# Altium PCB board.PcbDoc
Units mm, origin at the board's own origin, x right, y up, seen from the top; angles counter-clockwise.
Board outline 43 x 55 mm, 2 copper layers (Top Layer, Bottom Layer); 62 components, 39 nets, 217 pads, 106 vias.
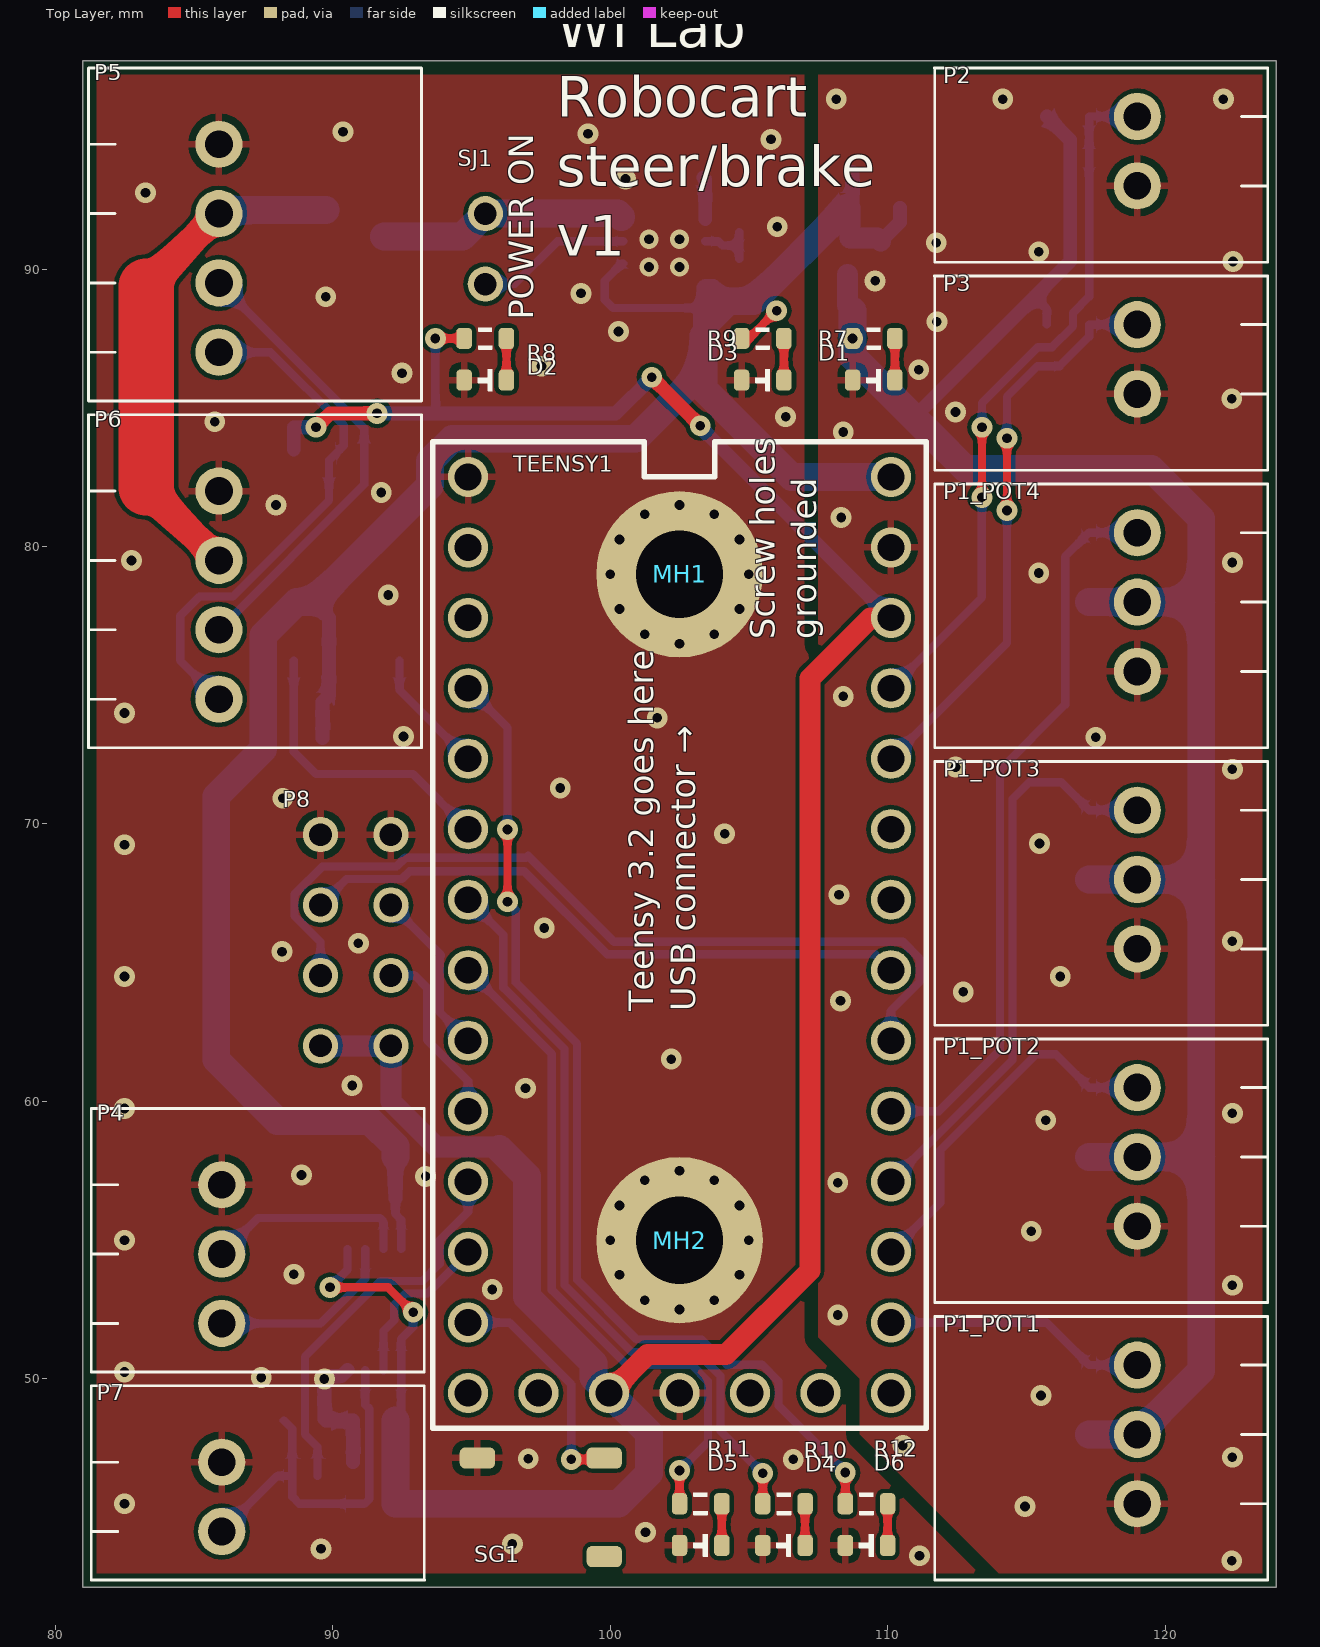
[diagram p0: Top Layer view]
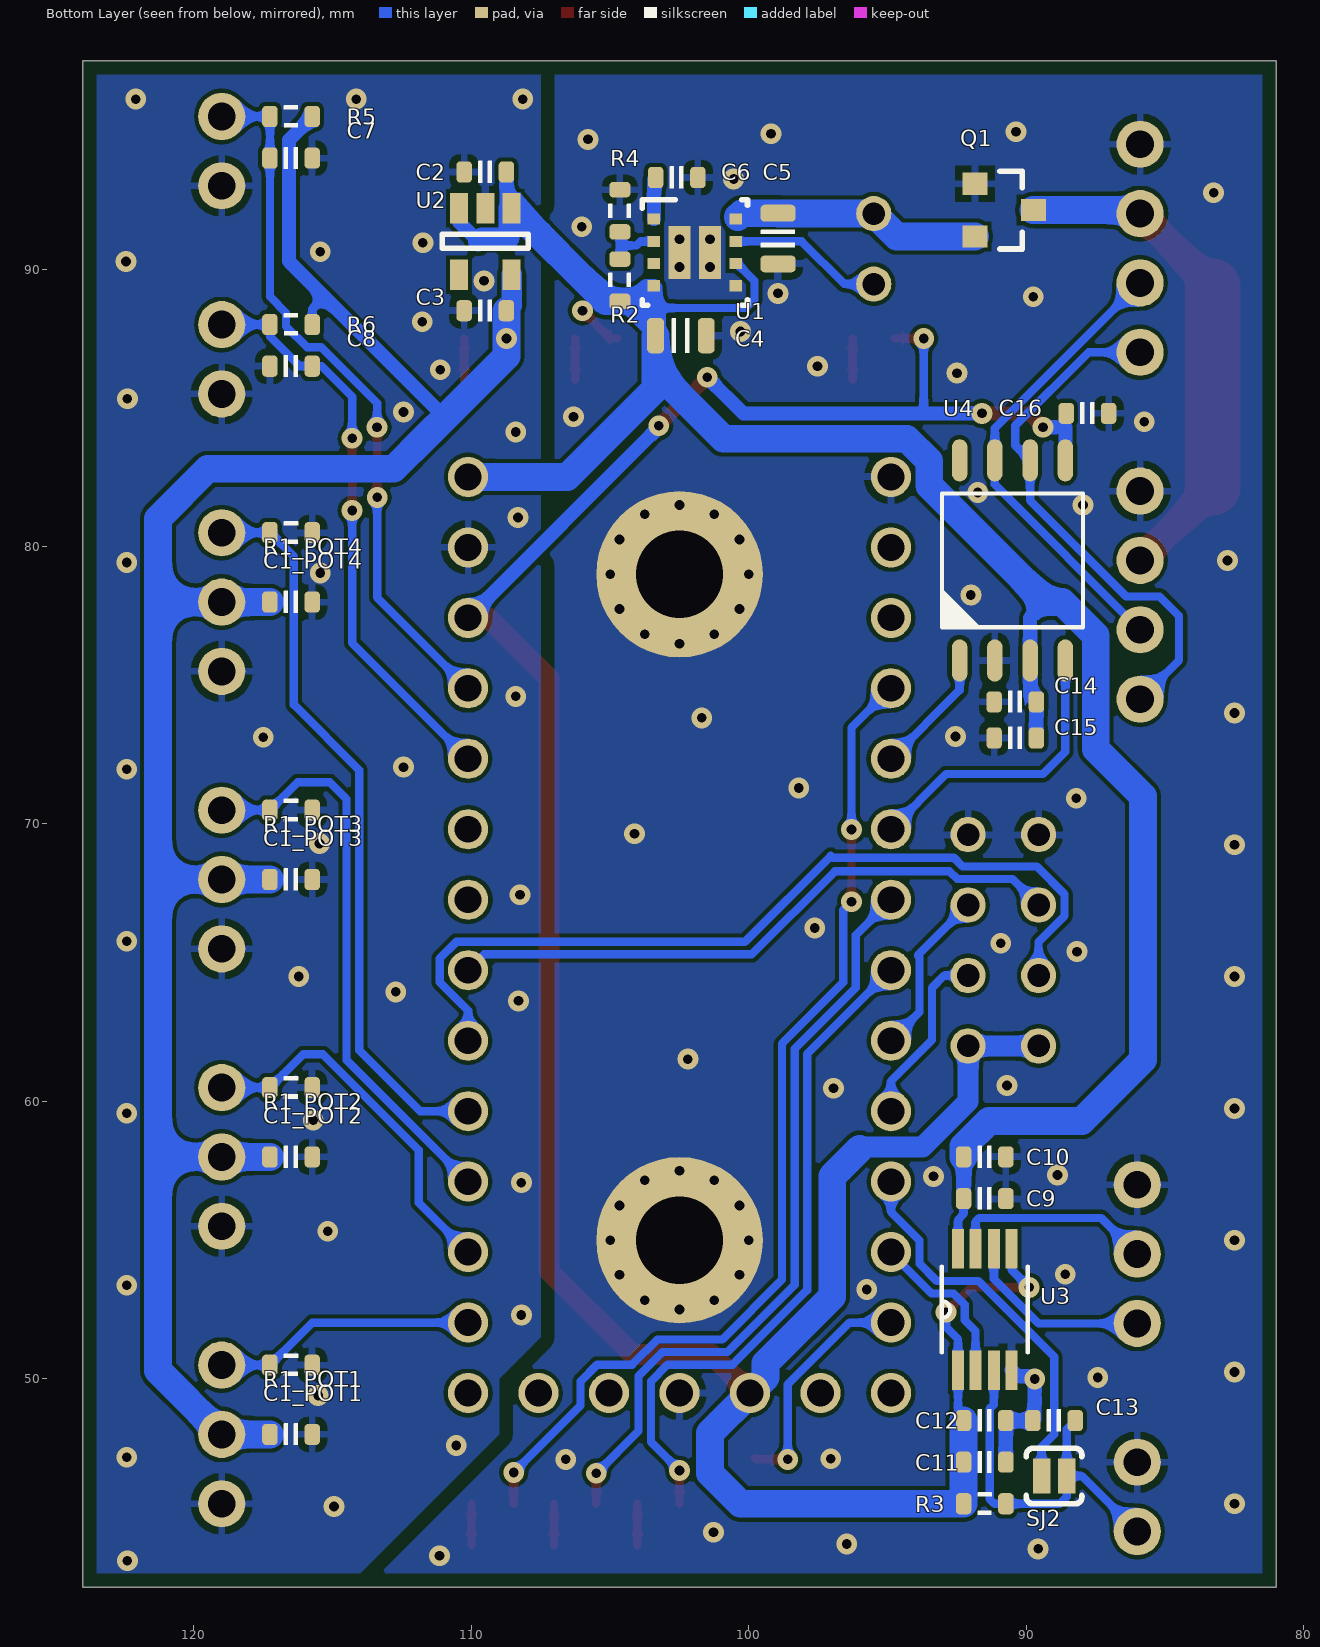
[diagram p1: Bottom Layer view, seen from below]
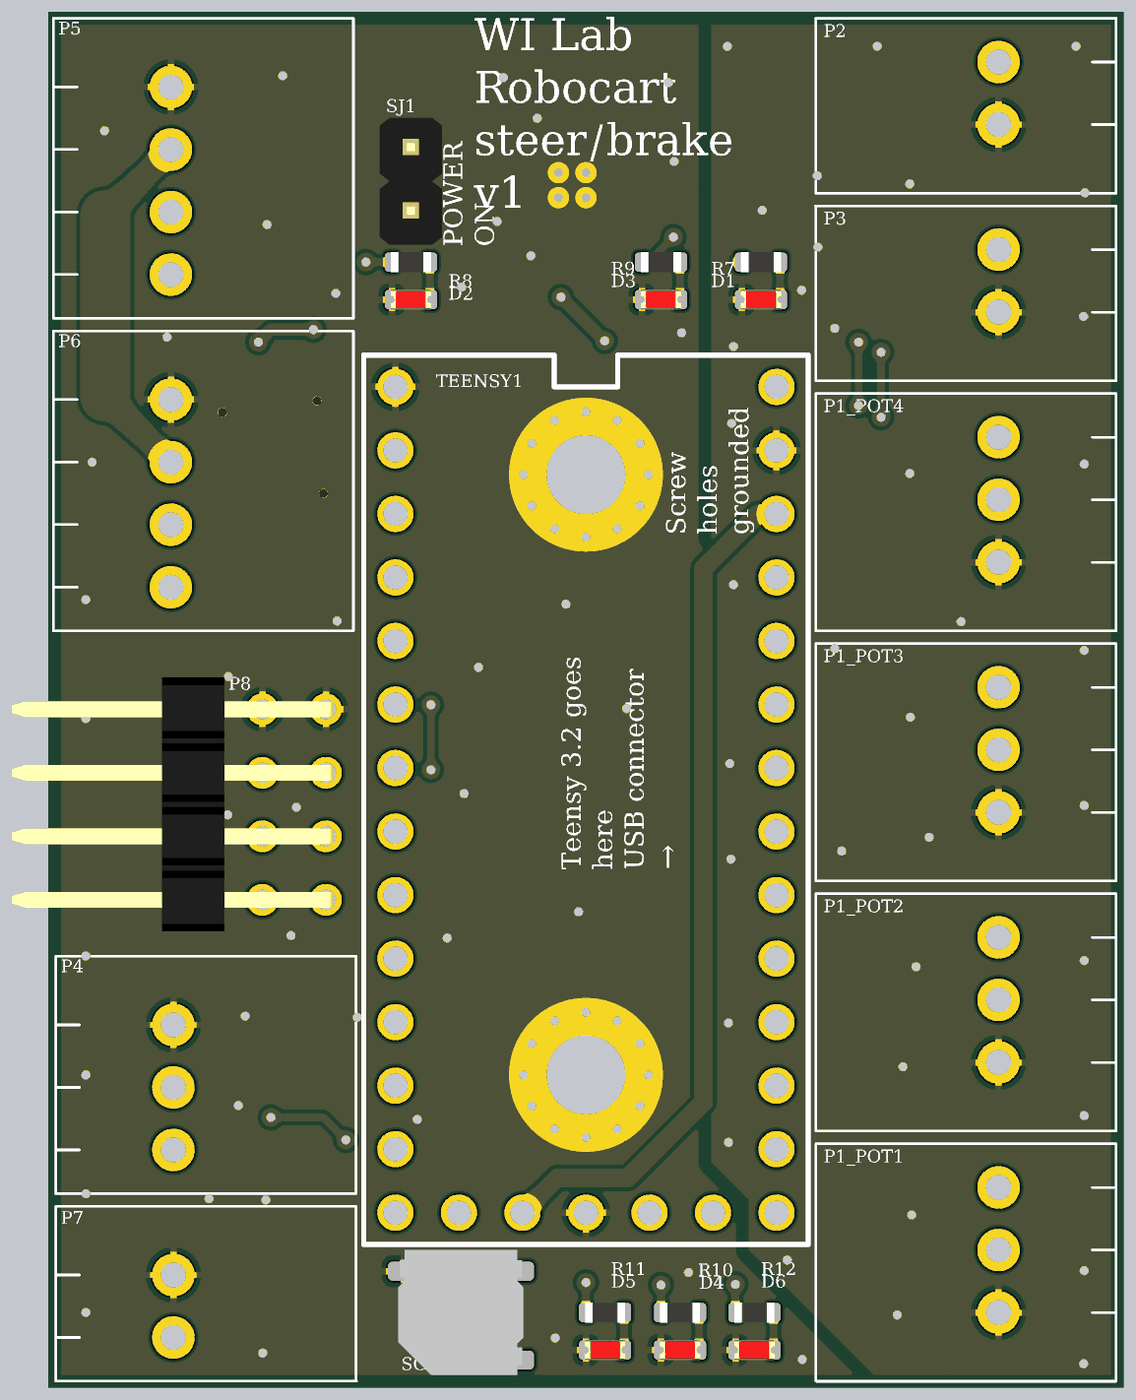
[diagram p2: 3D render of the assembled board from above, using the file's embedded part models]
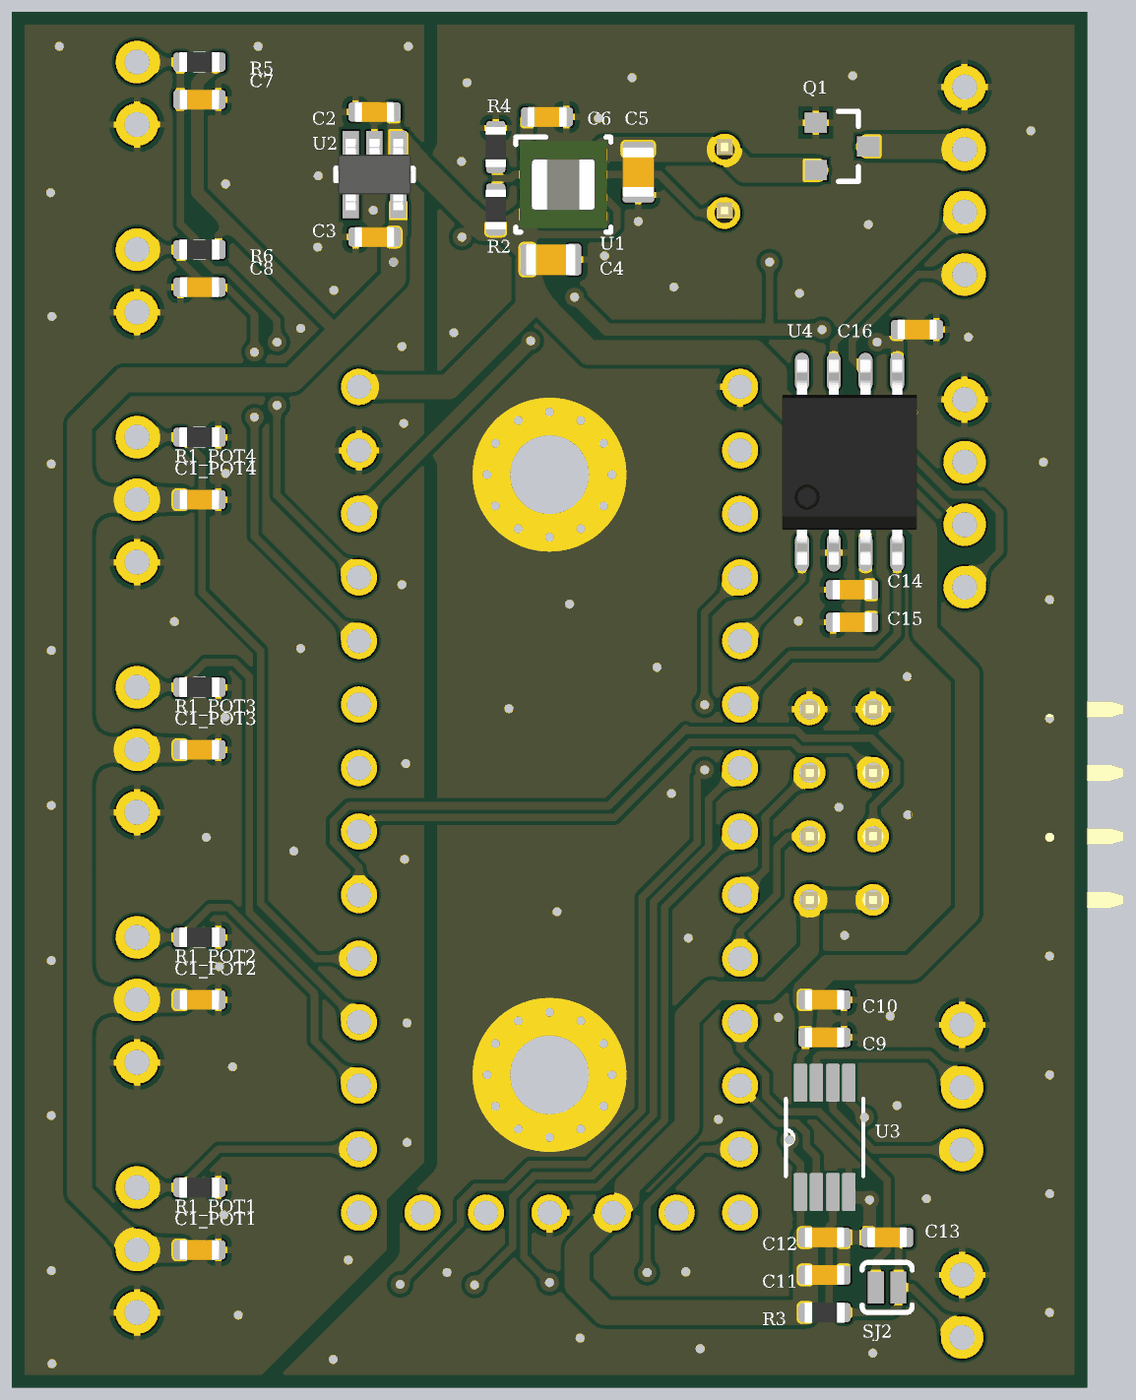
[diagram p3: 3D render of the assembled board from below, using the file's embedded part models]

## Layer stack, top to bottom
Top Solder: solder mask 0.0102, Solder Resist, Dk 3.5
Top Layer: signal copper 0.0356
Dielectric 1: dielectric 0.32, FR-4, Dk 4.8
Bottom Layer: signal copper 0.0356
Bottom Solder: solder mask 0.0102, Solder Resist, Dk 3.5

## Board outline
81,42.5 124,42.5 124,97.5 81,97.5

## Design rules (kind name [scope] priority, off if disabled: settings)
BoardOutlineClearance [InNetClass('All Nets')] p1: gap=0.381
Clearance "Stitching GND" [IsStitchingVia and InNet('GND') vs (IsVia and (Not IsStitchingVia)) Or IsPad] p1: gap=0.127
Clearance Clearance_outlinepolygon [inPolygon vs OnLayer('Keep-Out Layer')] p2: gap=0.4
Clearance Clearance-polygonpolygon [InPolygon vs InPolygon] p3: gap=0.5
Clearance Clearance_2 [All] p4: gap=0.152
ComponentClearance [InComponent('TEENSY1')] p1: gap=-999 collisioncheckmode=3 verticalgap=0.254 showdistances=FALSE
ComponentClearance ComponentClearance_4 [All] p2: gap=0.254 collisioncheckmode=3 verticalgap=0.254 showdistances=FALSE
HoleSize [All] p1: absolutevalues=TRUE maxlimit=6 minlimit=0.33 maxpercent=80.000 minpercent=20.000
MinimumAnnularRing ignore [(HasFootprint('LMZ21701SIL') OR HasFootprint('m3 hole') OR HasFootprint('G3T-12AH'))] p1: minimumring=0
MinimumAnnularRing [All] p2: minimumring=0.178
MinimumSolderMaskSliver [All] p1: minsoldermaskwidth=0.076
NetAntennae [All] p1: netantennaetolerance=2
PolygonConnect PolygonConnect_heat [(HasFootprint('LMZ21701SIL') OR HasFootprint('m3 hole') OR HasFootprint('G3T-12AH') OR IsVia)] p1: connectstyle=Direct reliefconductorwidth=0.254 reliefentries=4 polygonreliefangle="90 Angle" airgapwidth=0.254
PolygonConnect [All] p2: connectstyle=Relief reliefconductorwidth=0.254 reliefentries=4 polygonreliefangle="90 Angle" airgapwidth=0.254
RoomDefinition POT4 [InComponentClass('POT4')] p1: confinementstyle=ConfineIn formatcopy=TRUE lockcomponents=FALSE outline 124,72.5 124,82.5 111.5,82.5 111.5,72.5
RoomDefinition POT3 [InComponentClass('POT3')] p2: confinementstyle=ConfineIn formatcopy=TRUE lockcomponents=FALSE outline 124,62.5 124,72.5 111.5,72.5 111.5,62.5
RoomDefinition POT2 [InComponentClass('POT2')] p3: confinementstyle=ConfineIn formatcopy=TRUE lockcomponents=FALSE outline 124,52.5 124,62.5 111.5,62.5 111.5,52.5
RoomDefinition POT1 [InComponentClass('POT1')] p4: confinementstyle=ConfineIn formatcopy=TRUE lockcomponents=FALSE outline 124,42.5 124,52.5 111.5,52.5 111.5,42.5
RoutingVias [All] p1: holewidth=0.711 width=1.27 viastyle="Through Hole" minholewidth=0.711 minwidth=1.27 maxholewidth=0.711 maxwidth=1.27 useviatemplates=TRUE viatemplateguid#1={850C7D40-0D71-414F-9035-CEB09108B0E3} viatemplateguid#2={E962499E-84C4-4C12-BD13-6AB3B20336B4} viatemplatename#1=signal viatemplatename#2=v70h35mx0
SilkToSilkClearance [All] p1 off: silktosilkclearance=0
SilkToSolderMaskClearance SilkToSolderMaskClearance_1 [HasFootprint('PAD-JUMPER-2-NO_YES_SILK')] p1: minsilkscreentomaskgap=0 clearancetoexposedcopper=TRUE
SilkToSolderMaskClearance [IsPad] p2: minsilkscreentomaskgap=0.15 clearancetoexposedcopper=TRUE
SolderMaskExpansion [All] p1: expansion=0.076
Width [All] p1: maxlimit=25.375 minlimit=0.152 preferedwidth=0.3
24 further rules are at their usual default settings.

## Classes and differential pairs
component class POT1: C1_POT1 P1_POT1 R1_POT1
component class POT2: C1_POT2 P1_POT2 R1_POT2
component class POT3: C1_POT3 P1_POT3 R1_POT3
component class POT4: C1_POT4 P1_POT4 R1_POT4
component class Sheet1: C2 C3 C4 C5 C6 C7 C8 C9 C10 C11 C12 C13 C14 C15 C16 D1 D2 D3 D4 D5 D6 MH1 MH2 P2 P3 P4 P5 P6 P7 P8 Q1 R2 R3 R4 R5 R6 R7 R8 R9 R10 R11 R12 SG1 SJ1 SJ2 TEENSY1 U1 U2 U3 U4
channel class pot: POT1 POT2 POT3 POT4

## Components (designator, comment, footprint, x,y, rotation, side; value= is the part's Value field where it differs from the comment)
C1_POT1 "Cap_0603" CAP_0603 116.5,48 r0 bottom (schematic designator C1)
C1_POT2 "Cap_0603" CAP_0603 116.5,58 r0 bottom (schematic designator C1)
C1_POT3 "Cap_0603" CAP_0603 116.5,68 r0 bottom (schematic designator C1)
C1_POT4 "Cap_0603" CAP_0603 116.5,78 r0 bottom (schematic designator C1)
C2 "GRM188R71A225KE15D" CAP_0603 109.5,93.5 r180 bottom
C3 "GRM188R71A225KE15D" CAP_0603 109.5,88.5 r180 bottom
C4 "GRM188R71A225KE15D" CAP_0805 102.45,87.6 r180 bottom
C5 "GRM155R71E822KA01D" CAP_0805 98.95,91.1 r270 bottom
C6 "GRM155R71E822KA01D" CAP_0603 102.6,93.3 r180 bottom
C7 "Cap_0603" CAP_0603 116.5,94 r0 bottom
C8 "Cap_0603" CAP_0603 116.5,86.5 r180 bottom
C9 "Cap_0603" CAP_0603 91.5,56.5 r0 bottom
C10 "Cap_0603" CAP_0603 91.5,58 r0 bottom
C11 "Cap_0603" CAP_0603 91.5,47 r0 bottom
C12 "Cap_0603" CAP_0603 91.5,48.5 r0 bottom
C13 "Cap_0603" CAP_0603 89,48.5 r180 bottom
C14 "Cap_0603" CAP_0603 90.4,74.4 r180 bottom
C15 "Cap_0603" CAP_0603 90.4,73.1 r180 bottom
C16 "Cap_0603" CAP_0603 87.8,84.8 r0 bottom
D1 "LED_0603" LED_0603_RED 109.5,86 r180 top
D2 "LED_0603" LED_0603_RED 95.5,86 r180 top
D3 "LED_0603" LED_0603_RED 105.5,86 r180 top
D4 "LED_0603" LED_0603_RED 106.262,44 r180 top
D5 "LED_0603" LED_0603_RED 103.262,44 r180 top
D6 "LED_0603" LED_0603_RED 109.238,44 r180 top
MH1 "mounting hole" "M3 hole" 102.5,79 r0 top
MH2 "mounting hole" "M3 hole" 102.5,55 r0 top
P1_POT1 "pot" "COMBICON PTSA 3" 119,45.5 r90 top (schematic designator P1)
P1_POT2 "pot" "COMBICON PTSA 3" 119,55.5 r90 top (schematic designator P1)
P1_POT3 "pot" "COMBICON PTSA 3" 119,65.5 r90 top (schematic designator P1)
P1_POT4 "pot" "COMBICON PTSA 3" 119,75.5 r90 top (schematic designator P1)
P2 "brake_limit_sw_left" "COMBICON PTSA 2" 119,92.999 r90 top
P3 "brake_limit_sw_right" "COMBICON PTSA 2" 119,85.499 r90 top
P4 "Sabertooth" "COMBICON PTSA 3" 86,57 r270 top
P5 "CAN bus" "COMBICON PTSA 4" 85.9,94.5 r270 top
P6 "CAN bus" "COMBICON PTSA 4" 85.9,82 r270 top
P7 "st estop" "COMBICON PTSA 2" 86,47 r270 top
P8 "HDR2x4_2.54" HDR2X4_2.54_90 92.1,62 r180 top
Q1 "Generic PMOSFET    IRLML2244 - TRANS-11153 (SOT-23 -20V -4.3A) (1.Gate 2.Source 3.Drain)     FQP27P06 - COM-10349(TO-220 -60V -27A) (1.Gate 2.Source 3.Drain)" SOT23-3 90.85,92.125 r270 bottom
R1_POT1 "Res_0603" RES_0603 116.5,50.5 r0 bottom (schematic designator R1)
R1_POT2 "Res_0603" RES_0603 116.5,60.5 r0 bottom (schematic designator R1)
R1_POT3 "Res_0603" RES_0603 116.5,70.5 r0 bottom (schematic designator R1)
R1_POT4 "Res_0603" RES_0603 116.5,80.5 r0 bottom (schematic designator R1)
R2 "CRCW040235K7FKED" RES_0603 104.65,89.6 r270 bottom
R3 "Res_0603" RES_0603 91.5,45.5 r0 bottom
R4 "CRCW04026K81FKED" RES_0603 104.65,92.1 r270 bottom
R5 "Res_0603" RES_0603 116.5,95.5 r180 bottom
R6 "Res_0603" RES_0603 116.5,88 r180 bottom
R7 "Res_0603" RES_0603 109.5,87.5 r0 top
R8 "Res_0603" RES_0603 95.5,87.5 r0 top
R9 "Res_0603" RES_0603 105.499,87.5 r0 top
R10 "Res_0603" RES_0603 106.262,45.5 r0 top
R11 "Res_0603" RES_0603 103.262,45.5 r0 top
R12 "Res_0603" RES_0603 109.238,45.5 r0 top
SG1 "Buzzer 12mmSpark Fun Electronics SKU : Comp-Buzzer" Buzzer_5x5 97.5,45.5 r90 top
SJ1 "turn on" HDR1X2_2.54_180 95.5,92 r0 top
SJ2 "st s2" PAD-JUMPER-2-NO_YES_SILK 89,46.5 r180 bottom
TEENSY1 "Footprint for Teensy 3.1 board using all pin connections on the outer perimeter" TEENSY_3.1_BASIC_FIXED 102.5,66 r0 top
U1 "LMZ21701SIL" LMZ21701SIL 101.95,90.6 r0 bottom
U2 "LP5907MFX-3.3/NOPB" DBV0005A_N 109.5,91.001 r270 bottom
U3 "74LVCH2T45 Dual supply translating transceiver; 3-state" SOP65P490X110-8N 91.5,52.5 r90 bottom
U4 "TCAN1051HGV CAN transceiver" SOIC_E200_8 90.5,79.5 r90 bottom

## Footprints (in the part's own frame and the unit in brackets; to place one, negate y for a bottom-side part, rotate by r counter-clockwise, add the part's x,y. Pads: shape width x height; smd on the part's side, far side on the other; paste and mask are expansions set on the pad)
Buzzer_5x5 [mil]
  rrect50% 30x50 smd: N(65,90) NC(-75,-90) P(65,-90)
  body extent -98,-98 98,98, height 106
CAP_0603 [mil]
  rrect50% 22x30 smd: 1(-30,0) 2(30,0)
  silkscreen extent -10,-15 10,15, body extent -31,-16 31,16, height 31
CAP_0805 [mil]
  rrect50% 24x50 smd: 1(-36,0) 2(36,0)
  silkscreen extent -12,-24 12,24, body extent -39,-25 39,25, height 39
"COMBICON PTSA 2" [mm]
  round 1.7 hole 1: 1(0,0) 2(2.5,0)
  silkscreen extent -2.75,-4.7 4.25,7.32
"COMBICON PTSA 3" [mm]
  round 1.7 hole 1: 1(0,0) 2(2.5,0) 3(5,0)
  silkscreen extent -2.75,-4.7 6.75,7.3
"COMBICON PTSA 4" [mm]
  round 1.7 hole 1: 1(0,0) 2(2.5,0) 3(5,0) 4(7.5,0)
  silkscreen extent -2.75,-4.7 9.25,7.3
DBV0005A_N [mm]
  rect 1.1x0.65 smd: 1(-1.2,0.95) 2(-1.2,0) 3(-1.2,-0.95) 4(1.2,-0.95) 5(1.2,0.95)
  silkscreen extent -0.25,-1.55 0.25,1.55, body extent -1.42,-1.46 1.42,1.46, height 1.08
HDR1X2_2.54_180 [mil]
  round 50 hole 32: 1(0,0) 2(0,-100)
  body extent -49,-150 49,50, height 323
HDR2X4_2.54_90 [mil]
  round 50 hole 32: 1(0,0) 2(100,0) 3(0,-100) 4(100,-100) 5(0,-200) 6(100,-200) 7(0,-300) 8(100,-300)
  body extent -12,-350 495,50, height 198
LED_0603_RED [mil]
  rrect50% 22x30 smd: 1(-30,0) 2(30,0)
  silkscreen extent -10,-16 10,16, body extent -32,-16 32,16, height 24
LMZ21701SIL [mm]
  rect 0.45x0.4 smd mask+0.07: 1(1.475,-1.2) 2(1.475,-0.4) 3(1.475,0.4) 4(1.475,1.2) 5(-1.475,1.2) 6(-1.475,0.4) 7(-1.475,-0.4) 8(-1.475,-1.2)
  rect 0.8x1.9 smd paste-0.5 mask+0.07: 9(0.55,0) 10(-0.55,0)
  silkscreen extent -1.9,-1.9 1.9,1.9, body extent -1.75,-1.75 1.75,1.75, height 1.66
"M3 hole" [mm]
  round 0.7 hole 0.35: 1(-2.5,0) 1(-2.165,-1.25) 1(-2.165,1.25) 1(-1.25,-2.165) 1(-1.25,2.165) 1(0,-2.5) 1(0,2.5) 1(1.25,-2.165) 1(1.25,2.165) 1(2.165,-1.25) 1(2.165,1.25) 1(2.5,0)
  round 6 hole 3.15: 1(0,0)
PAD-JUMPER-2-NO_YES_SILK [mm]
  rect 0.635x1.27 smd: 1(-0.45,0) 2(0.45,0)
  silkscreen extent -1,-1 1,1
RES_0603 [mil]
  rrect50% 22x30 smd: 1(-30,0) 2(30,0)
  silkscreen extent -10,-16 10,16, body extent -31,-16 31,16, height 18
SOIC_E200_8 [mil]
  oval 60x22 smd: 1(-142,75) 2(-142,25) 3(-142,-25) 4(-142,-75) 5(142,-75) 6(142,-25) 7(142,25) 8(142,75)
  silkscreen extent -95,-100 95,100, body extent -161,-106 161,106, height 84
SOP65P490X110-8N [mil]
  rect 56x17 smd paste+1.97 mask+1.97: 1(-86,38) 2(-86,13) 3(-86,-13) 4(-86,-38) 5(86,-38) 6(86,-13) 7(86,13) 8(86,38)
  silkscreen extent -61,-61 61,61
SOT23-3 [mil]
  rect 31.5x35.43 smd: 1(-37.4,-39.37) 2(37.4,-39.37) 3(0,43.31)
  silkscreen extent -55,-4 55,28
TEENSY_3.1_BASIC_FIXED [mil]
  round 57 hole 38: 0(-300,550) 1(-300,450) 2(-300,350) 3(-300,250) 3.3V(-100,-650) 3.3V(300,450) 4(-300,150) 5(-300,50) 6(-300,-50) 7(-300,-150) 8(-300,-250) 9(-300,-350) 10(-300,-450) 11(-300,-550) 12(-300,-650) 13(300,-650) 14/A0(300,-550) 15/A1(300,-450) 16/A2(300,-350) 17/A3(300,-250) 18/A4(300,-150) 19/A5(300,-50) 20/A6(300,50) 21/A7(300,150) 22/A8(300,250) 23/A9(300,350) A14(200,-650) AGND(300,550) GND(-300,650) GND(0,-650) PGM(100,-650) VBAT(-200,-650) VIN(300,650)
  silkscreen extent -350,-700 350,700

## Part data
C1_POT1 C1_POT2 C1_POT3 C1_POT4 C7 C8 C9 C10 C11 C12 C13 C14 C15 C16: "Capacitor"
C2 C4: "CAP, CERM, 2.2uF, 10V, +/-10%, X7R, 0603"
C3: "CAP, CERM, 2.2 µF, 10 V, +/- 10%, X7R, 0603"
C5 C6: "CAP, CERM, 8200pF, 25V, +/-10%, X7R, 0402"
D1 D2 D3 D4 D5 D6: "LED"
MH1 MH2: library part TEST-POINT2
P1_POT1 P1_POT2 P1_POT3 P1_POT4 P4: library part HDR1x3_2.54, "Header"
P2 P3 P7: library part HDR1x2_2.54, "Header"
P5 P6: library part HDR1x4_2.54, "Header"
P8: "Header"
Q1: library part MOSFET-PCHANNEL
R1_POT1 R1_POT2 R1_POT3 R1_POT4 R3 R5 R6 R7 R8 R9 R10 R11 R12: "Resistor"
R2: "RES, 35.7k ohm, 1%, 0.063W, 0402"
R4: "RES, 6.81k ohm, 1%, 0.063W, 0402"
SG1: library part BUZZERPTH
SJ1 SJ2: library part JUMPER-PAD-2-NOROUND
TEENSY1: library part TEENSY_3.1_BASIC
U1: "1A SIMPLE SWITCHER Nano Module with 17V Maximum Input Voltage, SIL0008E"
U2: "ULTRA LOW-NOISE, 250-mA LINEAR REGULATOR FOR RF AND ANALOG CIRCUITS REQUIRES NO BYPASS CAPACITOR, DBV0005A"
U3: library part 74LVCH2T45
U4: library part TCAN1051HGV

## Via types
v1: diameter 0.75, hole 0.35, Top Layer to Bottom Layer, tented both sides, 102 vias
v2: diameter 0.7, hole 0.35, Top Layer to Bottom Layer, tented bottom, 4 vias

## Nets (pads, with @x,y where several pads share a name; then routed paths per layer and width w, separated by ;. In a path a pad name is that pad's centre, name@x,y a point inside that pad or via, vN(x,y) a via of type N, cw(c..) or ccw(c..) an arc to the next point about the centre after c; other vN are vias at no path point)
AGND: C1_POT1.1 C1_POT2.1 C1_POT3.1 C1_POT4.1 C2.1 C3.1 C7.1 C8.1 D1.2 P1_POT1.1 P1_POT2.1 P1_POT3.1 P1_POT4.1 P2.1 P3.1 R1_POT1.1 R1_POT2.1 R1_POT3.1 R1_POT4.1 TEENSY1.AGND U2.2
  other v1: 122.4,43.45 114.95,45.4 122.425,47.175 110.55,47.6 115.525,49.4 108.2,52.3 122.425,53.375 115.175,55.325 108.2,57.075 115.7,59.325 122.425,59.575 108.3,63.625 112.725,63.95 116.225,64.5 122.425,65.775 108.25,67.45 115.475,69.3 122.425,71.975 112.45,72.05 117.5,73.125 108.4,74.6 115.45,79.05 122.425,79.425 108.325,81.05 108.4,84.125 112.45,84.85 122.4,85.325 111.125,86.375 111.775,88.1 109.55,89.575 122.45,90.275 115.45,90.625 111.75,90.95 108.15,96.125 114.15,96.125 122.1,96.125
BEEPER: SG1.P TEENSY1.11 | length 8.6
  Top Layer w0.3: v1(98.6,47.1) 99.735,47.1 SG1.P
  Bottom Layer w0.3: TEENSY1.11 96.37,52.03 98.6,49.8 v1(98.6,47.1)
BRAKE_PEDAL_POT_WIPER: P1_POT4.3 R1_POT4.2 TEENSY1.17/A3 | length 26.6
  Bottom Layer w0.3: TEENSY1.17/A3 111.85,59.65 114.048,61.848 114.048,71.948 116.4,74.3 116.4,79.637 R1_POT4.2 P1_POT4.3
BRAKE_POT_WIPER: P1_POT2.3 R1_POT2.2 TEENSY1.15/A1 | length 13.4
  Bottom Layer w0.3: TEENSY1.15/A1 111.9,56.35 111.9,58.25 115.35,61.7 116.062,61.7 R1_POT2.2 ; R1_POT2.2 P1_POT2.3
CAN_RXD: TEENSY1.4 U4.4 | length 10.7
  Bottom Layer w0.3: U4.4 88.595,72.605 89.4,71.8 92.89,71.8 TEENSY1.4
CAN_TXD: TEENSY1.3 U4.1 | length 4.6
  Bottom Layer w0.3: U4.1 92.405,74.825 TEENSY1.3
GAS_PEDAL_POT_WIPER: P1_POT3.3 R1_POT3.2 TEENSY1.16/A2 | length 20.8
  Bottom Layer w0.3: TEENSY1.16/A2 114.5,61.49 114.5,70.9 115.1,71.5 116.262,71.5 R1_POT3.2 P1_POT3.3
GND: C4.2 C5.2 C6.2 C9.1 C10.1 C11.1 C12.1 C13.1 C14.1 C15.1 C16.1 D2.2 D3.2 D4.2 D5.2 D6.2 MH1.1 MH2.1 P4.1 P5.1 P6.1 P7.1 P8.7 P8.8 Q1.1 R4.1 SG1.N TEENSY1.GND U1.5 U1.9 U1.10 U3.4 U4.2 | length 5
  Bottom Layer w0.5: U3.4 90.319,50.1 89.7,50.1 89.7,48.562 C13.1 C12.1 C11.1
  other v1: 111.15,43.625 89.575,43.875 96.475,44.05 101.275,44.475 82.5,45.5 106.6,47.1 97.05,47.125 89.7,50 87.425,50.05 82.5,50.25 95.75,53.225 88.6,53.775 82.5,55 93.35,57.3 88.875,57.35 82.5,59.75 96.95,60.475 90.7,60.575 102.2,61.525 82.5,64.5 88.175,65.4 90.925,65.7 97.625,66.25 82.5,69.25 104.125,69.65 88.2,70.925 98.2,71.3 92.55,73.15 101.7,73.825 82.5,74 92,78.25 82.75,79.5 87.96,81.5 91.75,81.95 85.75,84.5 106.325,84.675 92.5,86.25 97.525,86.5 100.3,87.75 89.75,89 98.95,89.125 106.025,91.525 83.25,92.75 100.55,93.25 105.8,94.675 99.2,94.875 90.375,94.95
  other v2: 101.4,90.075 102.5,90.075 101.4,91.075 102.5,91.075
LED_BLUE: R12.1 TEENSY1.2 | length 37.1
  Top Layer w0.3: v1(96.3,67.2) v1(96.3,69.8) ; R12.1 v1(108.476,46.624)
  Bottom Layer w0.3: TEENSY1.2 96.3,73.47 v1(96.3,69.8) ; v1(96.3,67.2) 96.6,66.9 96.6,64.29 98.805,62.085 98.805,53.575 100.958,51.421 103.3,51.421 104.205,50.516 105.465,50.516 106.066,49.915 106.066,49.034 v1(108.476,46.624)
LED_RED: R10.1 TEENSY1.5 | length 27.5
  Top Layer w0.3: R10.1 v1(105.5,46.6)
  Bottom Layer w0.3: TEENSY1.5 96.148,66.002 96.148,64.102 98.352,61.897 98.352,53.387 100.771,50.969 103.112,50.969 103.979,50.102 103.979,48.121 v1(105.5,46.6)
LED_YELLOW: R11.1 TEENSY1.6 | length 24.6
  Top Layer w0.3: R11.1 v1(102.5,46.7)
  Bottom Layer w0.3: TEENSY1.6 97.9,61.71 97.9,53.2 100.584,50.516 102.925,50.516 103.526,49.915 103.526,47.726 v1(102.5,46.7)
NetC6_1: C6.1 U1.1 | length 1.5
  Bottom Layer w0.5: C6.1 103.425,93.237 U1.1
NetC13_2: C13.2 P7.2 R3.1 SJ2.2 U3.3 | length 13.9
  Bottom Layer w0.3: P7.2 88,46.5 SJ2.2@88.543,46.5 ; C13.2 88.543,48.195 SJ2.2@88.543,46.5 ; U3.3 91.17,49.074 91.32,48.924 91.32,45.68 91.14,45.5 R3.1 88.8,45.5 88.543,45.757 SJ2.2@88.543,46.5
NetD1_1: D1.1 R7.2 | length 1.5
  Top Layer w0.3: D1.1 R7.2
NetD2_1: D2.1 R8.2 | length 1.5
  Top Layer w0.3: D2.1 R8.2
NetD3_1: D3.1 R9.2 | length 1.5
  Top Layer w0.3: D3.1 R9.2
NetD4_1: D4.1 R10.2 | length 1.5
  Top Layer w0.3: D4.1 R10.2
NetD5_1: D5.1 R11.2 | length 1.5
  Top Layer w0.3: D5.1 R11.2
NetD6_1: D6.1 R12.2 | length 1.5
  Top Layer w0.3: D6.1 R12.2
NetP4_2: P4.2 U3.7 | length 7.4
  Bottom Layer w0.3: P4.2 87.3,55.8 91.7,55.8 91.83,55.67 U3.7
NetP4_3: P4.3 U3.6 | length 6.9
  Bottom Layer w0.3: P4.3 89.56,52 91.17,53.61 U3.6
NetP5_2: P5.2 P6.2 Q1.3 | length 18.6
  Top Layer w1: 83.275,82.125 P6.2 ; 83.275,89.375 P5.2
  Top Layer w2: 83.275,82.125 83.275,89.375
  Bottom Layer w1: P5.2 86.025,92.125 Q1.3
NetP5_3: P5.3 P6.3 U4.7 | length 16.8
  Bottom Layer w0.3: P6.3 91.135,82.235 U4.7 91.135,84.265 P5.3
NetP5_4: P5.4 P6.4 U4.6 | length 19.2
  Bottom Layer w0.3: P6.4 84.5,75.9 84.5,77.5 85.2,78.2 86.4,78.2 89.865,81.665 U4.6 90.4,83.642 90.4,84.36 87.76,87 P5.4
NetR2_1: R2.1 R4.2 U1.2 | length 2.3
  Bottom Layer w0.3: U1.2 103.9,91 104.05,90.85 104.65,90.85 ; R2.1 104.65,90.85 ; R4.2 104.65,90.85
NetSJ1_2: SJ1.2 U1.7 | length 5.1
  Bottom Layer w0.3: SJ1.2@96,89.46 96.56,89.46 98.1,91 U1.7
POT_CH1: P1_POT1.3 R1_POT1.2 TEENSY1.14/A0 | length 9.5
  Bottom Layer w0.3: TEENSY1.14/A0 115.732,52.03 R1_POT1.2 P1_POT1.3
RX3: P8.5 TEENSY1.7 | length 6.1
  Bottom Layer w0.3: P8.5 93.9,65.28 93.9,65.248 93.854,65.201 93.854,63.216 TEENSY1.7
SABERTOOTH_3V3_S1: TEENSY1.10 U3.2 | length 6
  Bottom Layer w0.3: U3.2 91.83,51.73 92.223,52.123 92.223,52.681 92.619,53.077 93.417,53.077 94.88,54.54 TEENSY1.10
SABERTOOTH_3V3_S2: SJ2.1 TEENSY1.9 | length 14.1
  Bottom Layer w0.3: SJ2.1 89.45,47.55 89,48 89,50.8 91.73,53.53 93.23,53.53 93.854,54.154 93.854,54.995 94.88,56.021 TEENSY1.9
SCL: P8.6 TEENSY1.19/A5 | length 22.5
  Bottom Layer w0.3: P8.6 90.497,68.017 92.488,68.017 92.767,68.296 96.904,68.296 99.9,65.3 109.55,65.3 TEENSY1.19/A5
SDA: P8.4 TEENSY1.18/A4 | length 31.3
  Bottom Layer w0.3: P8.4 89.56,65.754 88.623,66.692 88.623,67.468 89.624,68.47 92.301,68.47 92.615,68.784 96.979,68.784 97.048,68.852 100.144,65.756 110.545,65.756 111.146,65.155 111.146,64.305 110.12,63.279 TEENSY1.18/A4
STEER_LIMIT_SW_LEFT: C7.2 P2.2 R5.1 TEENSY1.23/A9 | length 25.7
  Top Layer w0.3: v1(113.398,81.773) 113.4,81.775 v1(113.4,84.3)
  Bottom Layer w0.3: TEENSY1.23/A9 113.398,78.168 v1(113.398,81.773) v1@113.3,81.87 ; v1(113.4,84.3) 113.4,85.168 115.415,87.183 115.928,87.183 116.68,87.936 116.68,88.424 117.262,89.006 C7.2 ; C7.2 R5.1 P2.2
STEER_LIMIT_SW_RIGHT: C8.2 P3.2 R6.1 TEENSY1.22/A8 | length 20.9
  Top Layer w0.3: v1(114.3,81.3) 114.3,83.7 114.2,83.8 v1(114.3,83.9)
  Bottom Layer w0.3: TEENSY1.22/A8 114.3,76.53 v1(114.3,81.3) ; v1(114.3,83.9) 114.3,85.4 115.4,86.5 C8.2 116.2,86.5 117.262,87.562 R6.1 ; R6.1@117.263,87.999 P3.2
TX3: P8.3 TEENSY1.8 | length 6.7
  Top Layer w0.254: P8.3@92.1,64.395 P8.3
  Bottom Layer w0.3: P8.3 92.96,64.54 93.401,64.099 93.401,62.217 94.88,60.739 TEENSY1.8
VCC3.3: C11.2 C12.2 C16.2 P8.1 P8.2 R3.2 R8.1 TEENSY1.3.3V U3.1 U3.5 U4.5 | length 109.5
  Top Layer w0.3: v1(89.9,53.3) 92,53.3 v1(92.9,52.4) ; v1(93.7,87.5) R8.1
  Top Layer w0.5: v1(89.4,84.3) 89.9,84.8 v1(91.6,84.8) ; v1(101.5,86.1) v1(103.25,84.35)
  Top Layer w0.75: TEENSY1.3.3V@99.96,49.49 101.345,50.875 104.175,50.875 107.2,53.9 107.2,75.25 109.38,77.43 TEENSY1.3.3V@110.12,77.43
  Bottom Layer w0.3: v1(89.9,53.3) 90.535,53.935 U3.5 ; C12.2 92.465,48.703 U3.1 92.465,51.435 92.9,51.87 v1(92.9,52.4) ; 93.7,84.8 v1(93.7,87.5)
  Bottom Layer w0.5: U4.5@88.595,83.495 88.595,84.3 v1(89.4,84.3) ; v1(91.6,84.8) 93.7,84.8 100.2,84.8 v1(101.5,86.1) ; v1(103.25,84.35) 103.25,84.3 TEENSY1.3.3V@110.12,77.43
  Bottom Layer w0.75: P8.2 P8.1 92.1,60 93.739,58.361 95.939,58.361 96,58.3
  Bottom Layer w1: C12.2 C11.2 R3.2 100.3,45.5 101.4,46.6 101.4,48.05 99.96,49.49 99.402,50.048 99.402,50.563 97,52.965 97,57.3 96,58.3
VCC5: C2.2 C4.1 C9.2 C10.2 C14.2 C15.2 R2.2 R9.1 TEENSY1.VIN U1.4 U1.6 U2.1 U2.3 U3.8 U4.3 | length 84.7
  Top Layer w0.3: R9.1 105,87.5 v1(106,88.5)
  Bottom Layer w0.3: C9.2 92.262,55.938 92.465,55.735 U3.8 ; U1.6 100.422,90.2 99.8,89.578 99.8,88.9 100.1,88.6 103.364,88.6 ; 105.16,88.838 105.662,88.838 v1(106,88.5)
  Bottom Layer w0.5: 89.3,78 89.865,77.435 U4.3 89.865,74.627 C14.2 C15.2 ; C9.2 C10.2 ; C4.1 103.364,88.6 103.364,89.339 U1.4 103.7,89.4 104.262,88.838 ; U2.1 108.738,92.389 C2.2 ; 109.751,91 110.45,91.699 U2.3
  Bottom Layer w0.75: U2.1 108.648,92.103 108.648,91.123 109.627,91.123 109.751,91
  Bottom Layer w1: C10.2 92.262,58.385 91.347,59.3 88,59.3 85.8,61.5 85.8,71 87.5,72.7 87.5,76.798 88.702,78 89.3,78 93.504,82.204 93.504,83.08 94.31,83.886 100.915,83.886 103.364,86.336 ; C4.1 103.364,86.336 ; 104.262,88.838 R2.2 105.16,88.838 U2.1@108.523,92.201 ; TEENSY1.VIN 106.543,82.51 103.364,85.689 103.364,86.336
VCC12: C5.1 Q1.2 SJ1.1 U1.8 | length 9
  Bottom Layer w1: Q1.2 94.675,91.175 SJ1.1 98.936,92 C5.1 100.261,92.014 U1.8@100.401,91.874
VCCA3.3: C1_POT1.2 C1_POT2.2 C1_POT3.2 C1_POT4.2 C3.2 P1_POT1.2 P1_POT2.2 P1_POT3.2 P1_POT4.2 R5.2 R6.2 R7.1 U2.5 | length 80.4
  Bottom Layer w0.3: 115.3,89 115.738,88.562 R6.2
  Bottom Layer w0.5: 111,84.6 111,84.7 115.3,89 116.58,90.28 116.58,94.658 R5.2
  Bottom Layer w0.75: U2.5 108.55,88.688 C3.2
  Bottom Layer w1: C3.2 v1(108.738,87.5) 108.738,86.862 111,84.6 111.525,84.075 ; 111.6,84 112.8,82.8 119.5,82.8 121.3,81 121.3,78 ; C1_POT4.2 P1_POT4.2 121.3,78 ; C1_POT1.2@117.262,48 P1_POT1.2 121.3,50.3 121.3,58 ; C1_POT2.2@117.262,58 P1_POT2.2 121.3,58 ; C1_POT3.2 P1_POT3.2 121.3,68 ; 121.3,58 121.3,68 ; 121.3,68 121.3,78
pads on no net: SG1.NC TEENSY1.0 TEENSY1.1 TEENSY1.12 TEENSY1.13 TEENSY1.20/A6 TEENSY1.21/A7 TEENSY1.A14 TEENSY1.PGM TEENSY1.VBAT U1.3 U2.4 U4.8

## Polygon pours and split planes (outlines as drawn)
AGND on Top Layer "agnd_top" (solid, pour order 0): 123.5,97 107.5,97 107.5,86.5 107.5,51.5 109,50 109,48 114,43 123.5,43 123.5,43.5
GND on Top Layer "gnd_top" (solid, pour order 6): 81.5,97 123.5,97 123.5,43 81.5,43
AGND on Bottom Layer "agnd_bottom" (solid, pour order 2): 123.5,97 107.5,97 107.5,51.5 109,50 109,48 114,43 123.5,43
GND on Bottom Layer "gnd_bottom" (solid, pour order 8): 81.5,97 123.5,97 123.5,43 81.5,43

## Other copper
Bottom Layer:
  region net VCC5: 103.7,89.5 104,89.2 104.6,89.2 104.6,88.5 103.8,87.7 103,87.7 103,88.7 103.2,88.9 103.2,89.5

## Silkscreen, mask and mechanical layers (free items; w line width, h text height)
Top Overlay:
  text "WI Lab / Robocart / steer/brake / v1" at 98.075,90 h2.5
  text "POWER ON" at 97.525,88.175 h1.5 r90
  text "Screw holes / grounded" at 107.725,76.65 h1.5 r90
  text "Teensy 3.2 goes here / USB connector →" at 103.35,63.25 h1.5 r90
Mechanical 7:
  lines w0.1: 81,43 ccw(c81.5,43) 81.5,42.5 123.5,42.5 ccw(c123.5,43) 124,43 124,97 ccw(c123.5,97) 123.5,97.5 81.5,97.5 ccw(c81.5,97) 81,97 81,43